# Altium PCB display.PcbDoc
Units mm, origin at the board's own origin, x right, y up, seen from the top; angles counter-clockwise.
Board outline 100 x 100 mm, 2 copper layers (Top Layer, Bottom Layer); 29 components, 52 nets, 138 pads, 0 vias.
Unrouted connection lines stored in the file: 75.
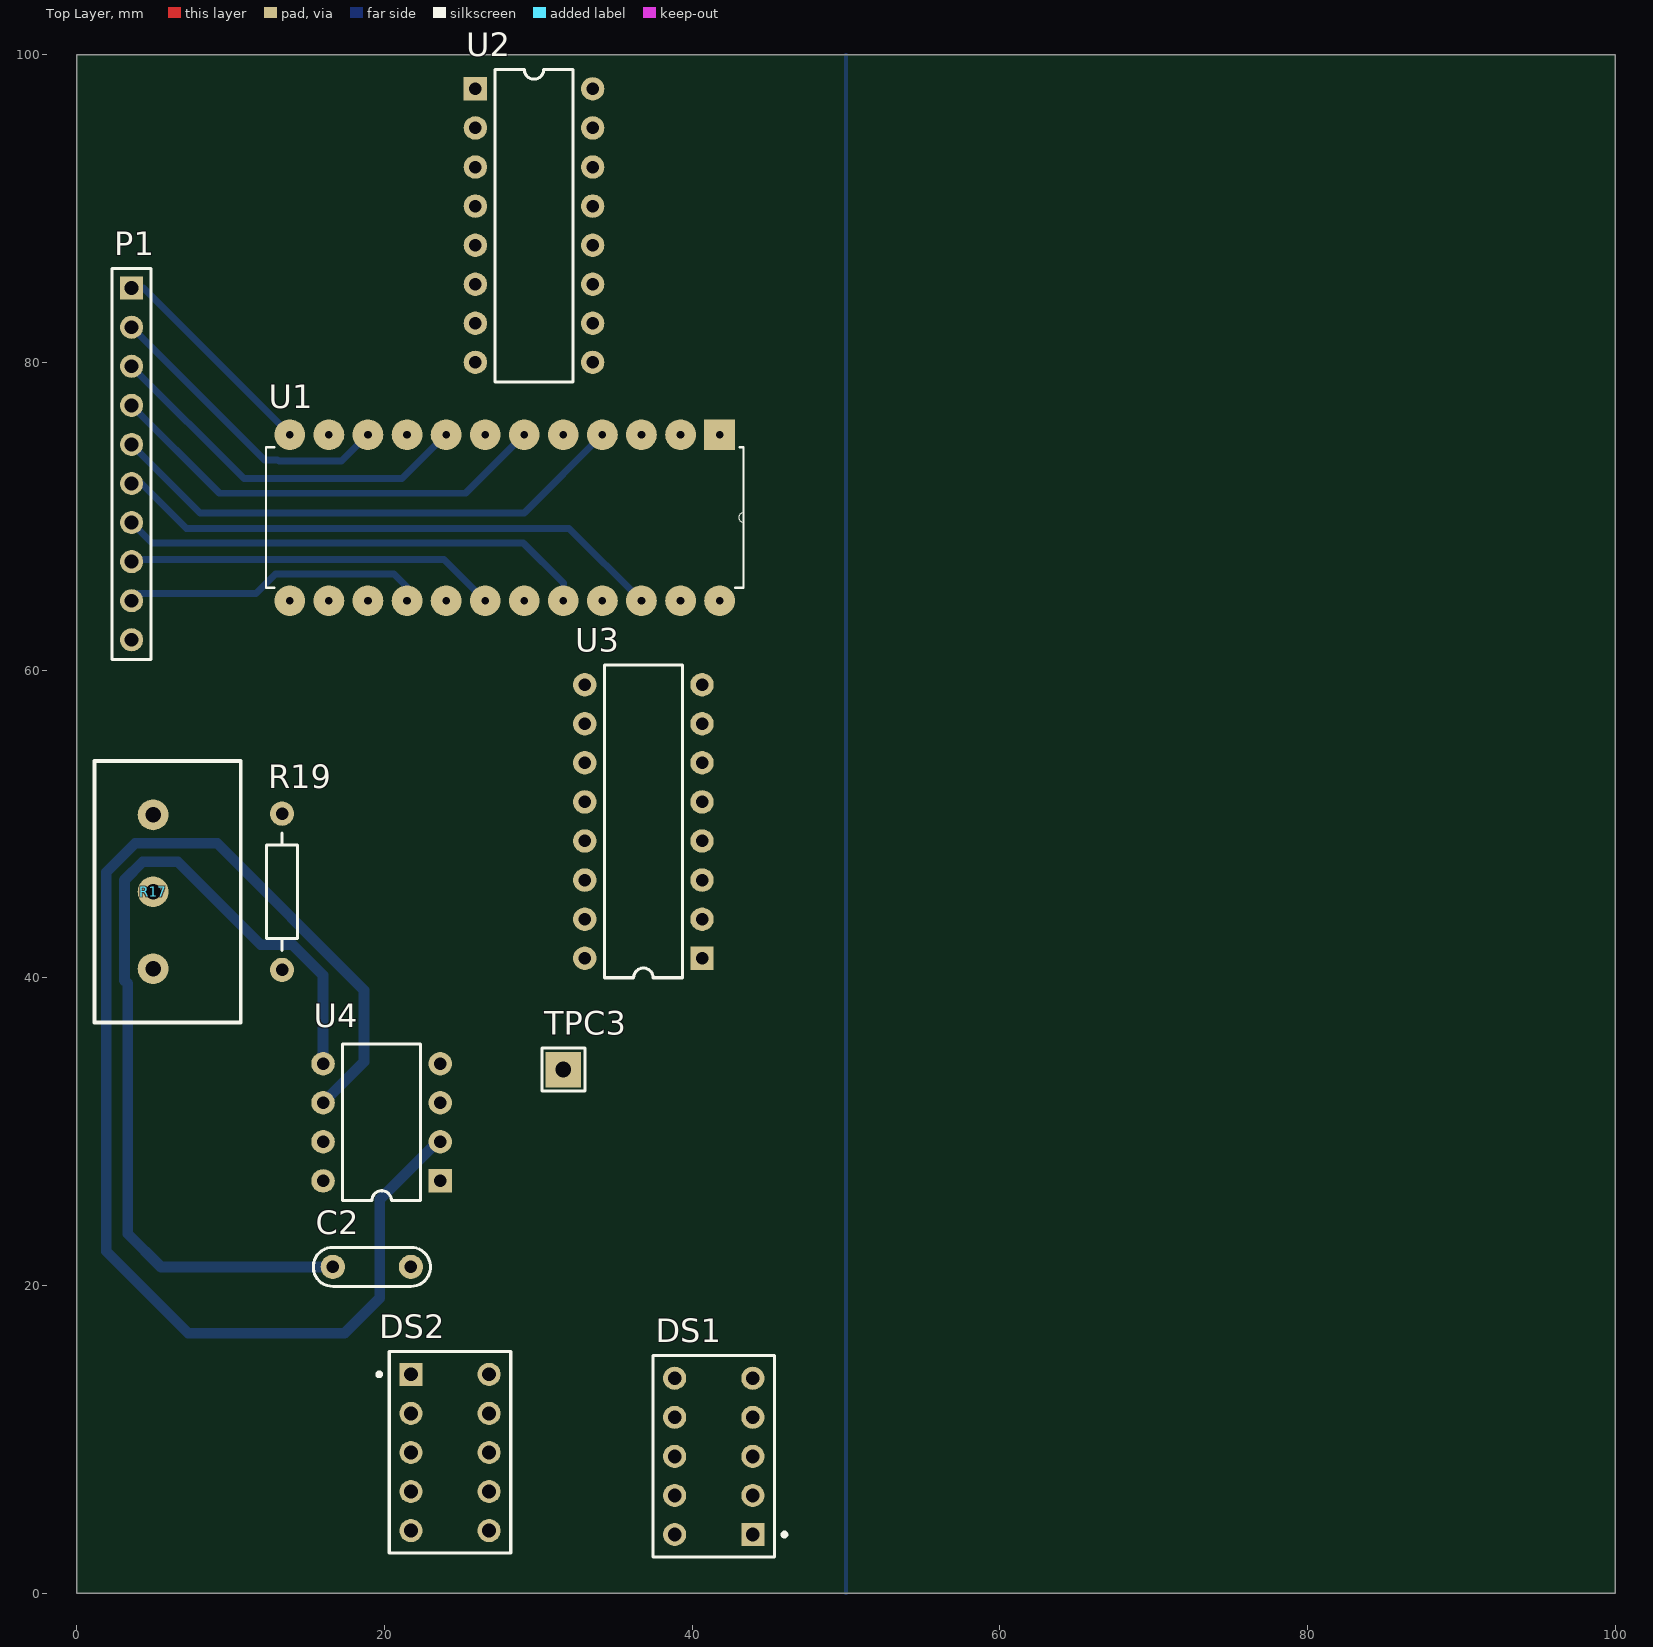
[diagram p0: Top Layer view]
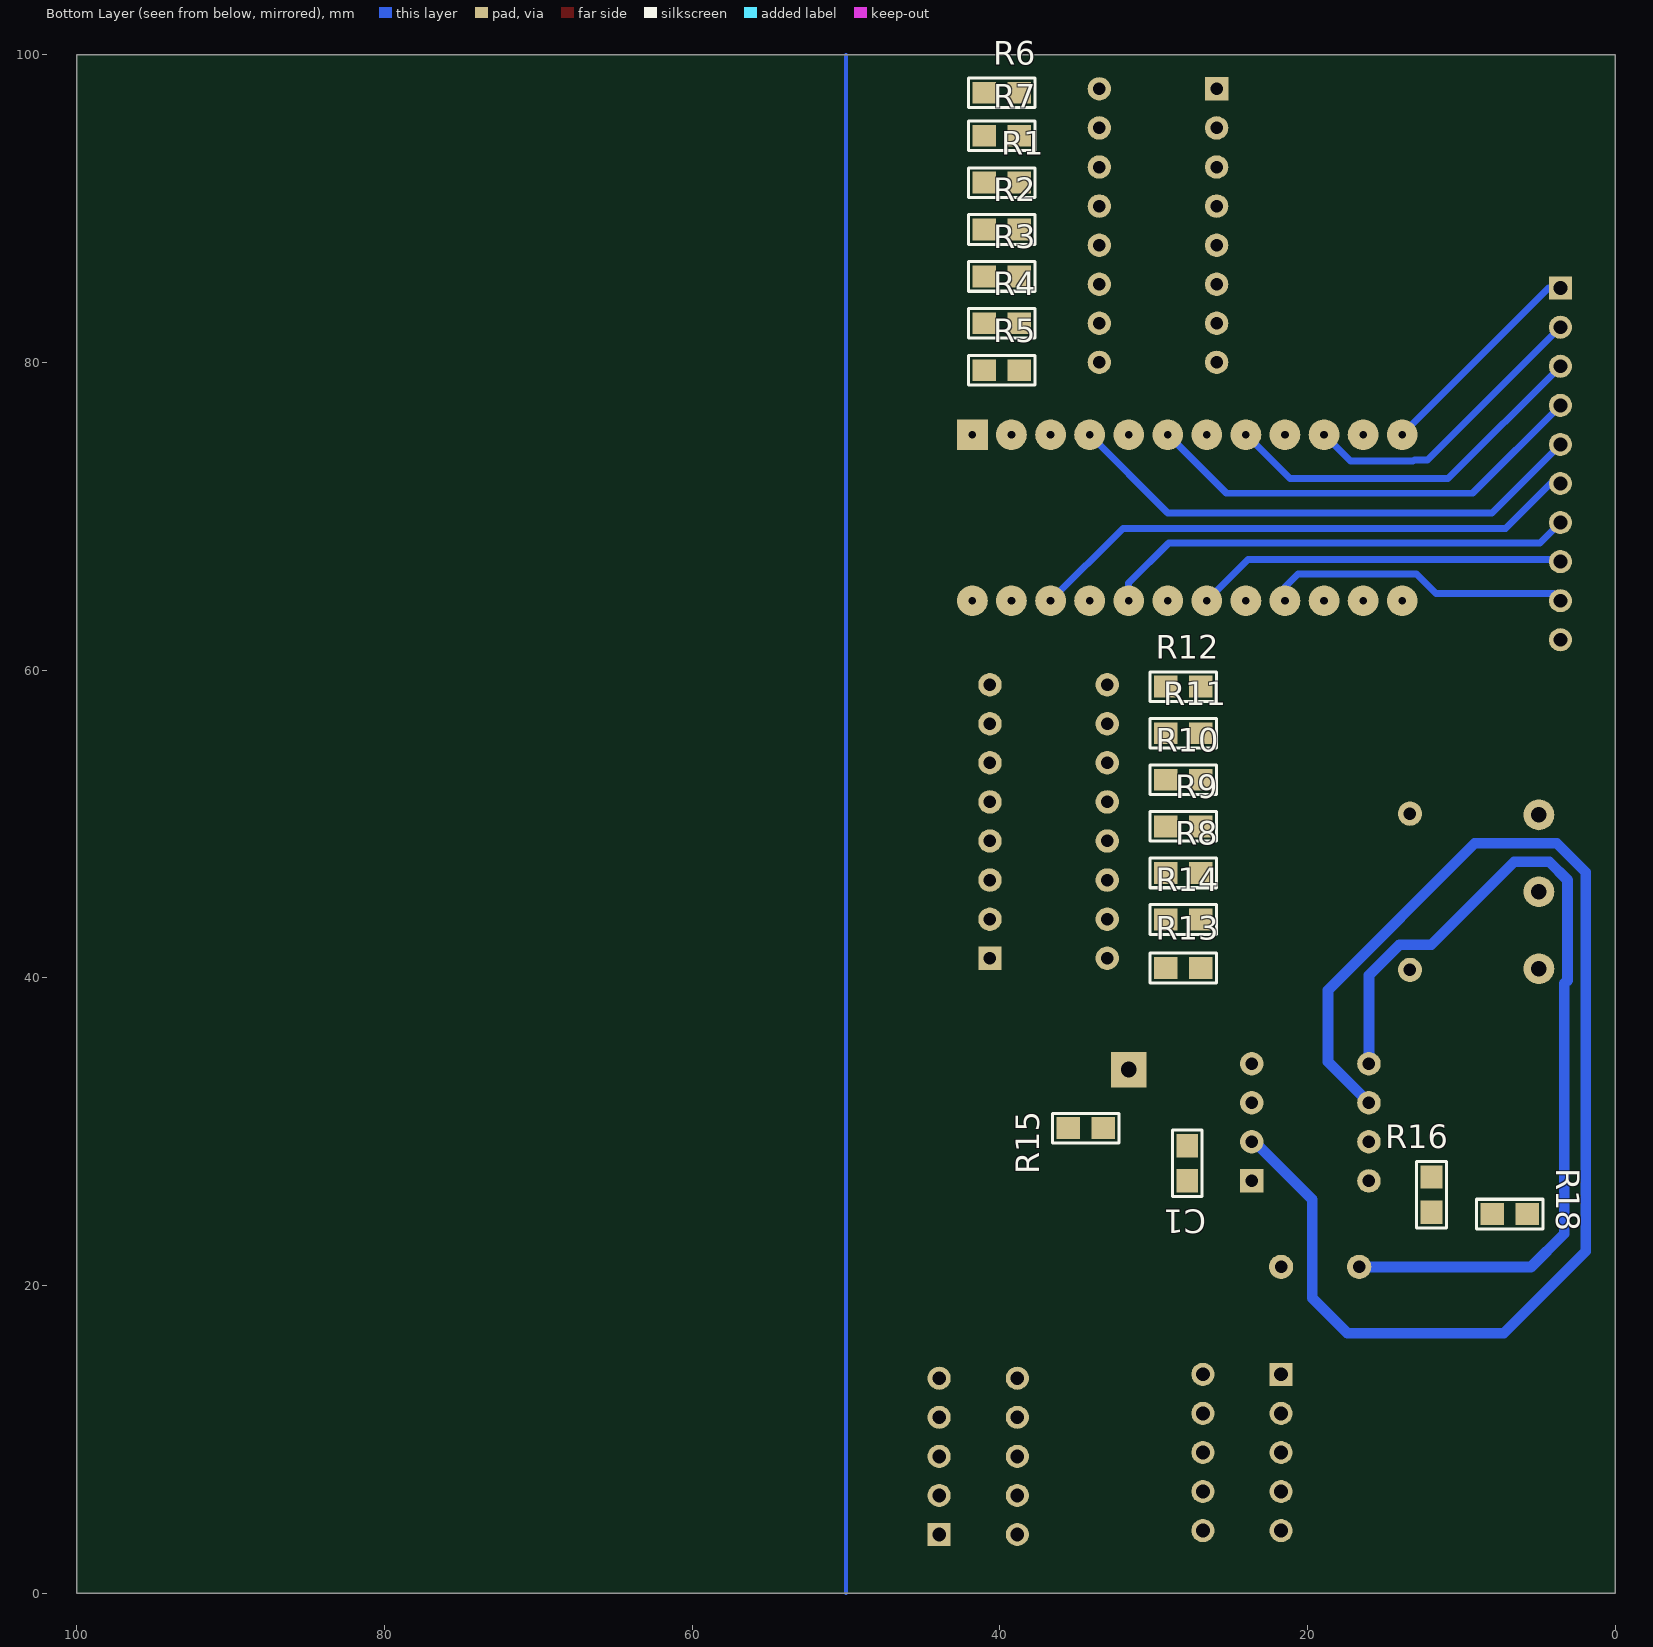
[diagram p1: Bottom Layer view, seen from below]

## Layer stack, top to bottom
Top Solder: solder mask 0.0102, Solder Resist, Dk 3.5
Top Layer: signal copper 0.0356
Dielectric 1: dielectric 0.32, FR-4, Dk 4.8
Bottom Layer: signal copper 0.0356
Bottom Solder: solder mask 0.0102, Solder Resist, Dk 3.5

## Board outline
0,0 100,0 100,100 0,100

## Design rules (kind name [scope] priority, off if disabled: settings)
Clearance [All] p1: gap=0.5 ignorepadtopadclearanceinfootprint=FALSE
PolygonConnect [All] p1: connectstyle=Relief reliefconductorwidth=0.254 reliefentries=4 polygonreliefangle="90 Angle" airgapwidth=0.254
RoutingVias [All] p1: holewidth=0.5 width=2 viastyle="Through Hole" minholewidth=0.5 minwidth=1.5 maxholewidth=0.5 maxwidth=2
SolderMaskExpansion [All] p1: expansion=0.102
Width [All] p1: maxlimit=0.8 minlimit=0.45 preferedwidth=0.7
30 further rules are at their usual default settings.

## Components (designator, comment, footprint, x,y, rotation, side; value= is the part's Value field where it differs from the comment)
C1 "4.7u" 0805 27.813,27.94 r270 bottom
C2 "10n" CAP200 19.177,21.209 r180 top
DS1 "Dpy Red-CC" A 41.402,8.89 r180 top
DS2 "Dpy Red-CC" A 24.257,9.144 r0 top
P1 "Header 10" HDR1X10 3.556,84.836 r270 top
R1 "RES" 0805 39.878,91.694 r0 bottom
R2 "RES" 0805 39.878,88.646 r0 bottom
R3 "RES" 0805 39.878,85.598 r0 bottom
R4 "RES" 0805 39.878,82.55 r0 bottom
R5 "RES" 0805 39.878,79.502 r0 bottom
R6 "RES" 0805 39.878,97.536 r0 bottom
R7 "RES" 0805 39.878,94.742 r0 bottom
R8 "RES" 0805 28.067,46.821 r180 bottom
R9 "RES" 0805 28.067,49.848 r180 bottom
R10 "RES" 0805 28.067,52.874 r180 bottom
R11 "RES" 0805 28.067,55.901 r180 bottom
R12 "RES" 0805 28.067,58.928 r180 bottom
R13 "RES" 0805 28.067,40.64 r180 bottom
R14 "RES" 0805 28.067,43.794 r180 bottom
R15 "RES" 0805 34.417,30.226 r0 bottom
R16 "180" 0805 11.938,25.908 r90 bottom
R17 "500k" POTENCIOMETRO 4.953,45.593 r270 top
R18 "15k" 0805 6.858,24.638 r0 bottom
R19 "680k" RES400 13.335,50.673 r270 top
TPC3 "TP" TPTH 31.623,34.036 r0 top
U1 "CD4508BE" *DIP254P1080X508-24 13.843,64.516 r270 top
U2 "CD4511" DIP16 25.908,97.79 r0 top
U3 "CD4511" DIP16 40.64,41.275 r180 top
U4 "LM555" DIP8 23.622,26.797 r180 top

## Footprints (in the part's own frame and the unit in brackets; to place one, negate y for a bottom-side part, rotate by r counter-clockwise, add the part's x,y. Pads: shape width x height; smd on the part's side, far side on the other; paste and mask are expansions set on the pad)
0805 [mil] "Pasivo 0805"
  rect 60x56 smd: 1(-45,0) 2(45,0)
  silkscreen extent -85,-38 85,38, body extent -39,-25 39,25, height 15
*DIP254P1080X508-24 [mm]
  rect 2x2 hole 0.5: 1(-10.795,27.94)
  round 2 hole 0.5: 2(-10.795,25.4) 3(-10.795,22.86) 4(-10.795,20.32) 5(-10.795,17.78) 6(-10.795,15.24) 7(-10.795,12.7) 8(-10.795,10.16) 9(-10.795,7.62) 10(-10.795,5.08) 11(-10.795,2.54) 12(-10.795,0) 13(0,0) 14(0,2.54) 15(0,5.08) 16(0,7.62) 17(0,10.16) 18(0,12.7) 19(0,15.24) 20(0,17.78) 21(0,20.32) 22(0,22.86) 23(0,25.4) 24(0,27.94)
  silkscreen extent -9.98,-1.55 -0.84,29.49
A [mm] "LED, 7-Segment Display, 7.62 mm, RHD; 10 Leads; Row Space 5.08 mm; Pitch 2.54 mm"
  rect 1.5x1.5 hole 0.9: 1(-2.54,5.08)
  round 1.5 hole 0.9: 2(-2.54,2.54) 3(-2.54,0) 4(-2.54,-2.54) 5(-2.54,-5.08) 6(2.54,-5.08) 7(2.54,-2.54) 8(2.54,0) 9(2.54,2.54) 10(2.54,5.08)
  silkscreen extent -4.73,-6.55 3.95,6.55, body extent -3.95,-6.55 3.95,6.55, height 6.34
CAP200 [mil]
  round 62 hole 32: 1(-100,0) 2(100,0)
  silkscreen extent -150,-50 150,50, body extent -110,-46 110,44, height 246
DIP8 [mil]
  rect 60x60 hole 32: 1(0,0)
  round 60 hole 32: 2(0,-100) 3(0,-200) 4(0,-300) 5(300,-300) 6(300,-200) 7(300,-100) 8(300,0)
  silkscreen extent 50,-350 250,50, body extent -3,-363 303,63, height 177
DIP16 [mil]
  rect 60x60 hole 32: 1(0,0)
  round 60 hole 32: 2(0,-100) 3(0,-200) 4(0,-300) 5(0,-400) 6(0,-500) 7(0,-600) 8(0,-700) 9(300,-700) 10(300,-600) 11(300,-500) 12(300,-400) 13(300,-300) 14(300,-200) 15(300,-100) 16(300,0)
  silkscreen extent 50,-750 250,50, body extent -3,-744 307,44, height 78
HDR1X10 [mm] "Connector; Header; 10 Position"
  rect 1.5x1.5 hole 0.9: 1(0,0)
  round 1.5 hole 0.9: 2(2.54,0) 3(5.08,0) 4(7.62,0) 5(10.16,0) 6(12.7,0) 7(15.24,0) 8(17.78,0) 9(20.32,0) 10(22.86,0)
  silkscreen extent -1.27,-1.27 24.13,1.27
POTENCIOMETRO [mm]
  round 2 hole 1: 1(-5,0) 2(0,0) 3(5,0)
  silkscreen extent -8.5,-3.8 8.5,5.7, body extent -7.87,-20.53 7.87,5.03, height 20.12
RES400 [mil]
  round 62 hole 32: 1(0,0) 2(400,0)
  silkscreen extent 50,-40 350,40, body extent -12,-45 412,46, height 96
TPTH [mm]
  rect 2.3x2.3 hole 1.016: 1(0,0)
  silkscreen extent -1.4,-1.4 1.4,1.4, body extent -1.27,-1.27 1.27,1.27, height 6.04

## Part data
C1 C2: library part CAP
DS1 DS2: "7.62 mm Black Surface HER 7-Segment Display: CC, RH DP", Colour="High Efficiency Red (HER)", ComponentLink1Description="Manufacturer Link", ComponentLink1URL=http://www.agilent.com/, DatasheetVersion=19-Feb-2002, LatestRevisionDate=17-Dec-2003, LatestRevisionNote="Schematic revised, PCB Footprint replaced.", MinimumIntensity="360 ucd", Note="IF = 5 mA", PackageDescription="LED, 7-Segment Display, 7.62 mm, RHD; 10 Leads; Row Space 5.08 mm; Pitch 2.54 mm", PackageReference=A, PackageVersion=11-Feb-2002, Published=8-Jun-2000, Publisher="Altium Limited"
P1: "Header, 10-Pin", LatestRevisionDate=17-Jul-2002, LatestRevisionNote="Re-released for DXP Platform.", Publisher="Altium Limited"
R16 R18 R19: library part RES
R17: library part POTENCIOMETRO
U1: "Latch Transparent 3-ST 8-CH D-Type 24-Pin PDIP", Package="DIP-24 Texas Instruments", Availability=Unavailable, MF="Texas Instruments", MP=CD4508BE, Price=None, SnapEDA_Link=https://www.snapeda.com/parts/CD4508BE/Texas%20Instruments/view-part/?ref=snap
U2 U3: "BCD to 7 SEGMENTOS"
U4: "Timer"

## Nets (pads, with @x,y where several pads share a name; then routed paths per layer and width w, separated by ;. In a path a pad name is that pad's centre, name@x,y a point inside that pad or via, vN(x,y) a via of type N, cw(c..) or ccw(c..) an arc to the next point about the centre after c; other vN are vias at no path point)
bit0: P1.5 U1.4 | length 34.6
  Bottom Layer w0.45: P1.5 8.001,70.231 29.083,70.231 U1.4
bit1: P1.4 U1.6 | length 29.5
  Bottom Layer w0.45: P1.4 9.271,71.501 25.273,71.501 U1.6
bit2: P1.3 U1.8 | length 24.7
  Bottom Layer w0.45: P1.3 10.861,72.451 21.143,72.451 U1.8
bit3: P1.2 U1.10 | length 19.7
  Bottom Layer w0.45: P1.2 12.192,73.66 13.054,73.66 13.128,73.586 17.198,73.586 U1.10
bit4: P1.9 U1.16 | length 19.9
  Bottom Layer w0.45: P1.9 4.012,64.972 11.632,64.972 12.901,66.241 20.627,66.241 21.463,65.405 U1.16
bit5: P1.8 U1.18 | length 24.2
  Bottom Layer w0.45: P1.8 3.691,67.191 23.868,67.191 U1.18
bit6: P1.7 U1.20 | length 30.8
  Bottom Layer w0.45: P1.7 4.887,68.265 29.017,68.265 31.623,65.659 U1.20
bit7: P1.6 U1.22 | length 36.3
  Bottom Layer w0.45: P1.6 4.191,72.136 7.112,69.215 32.004,69.215 U1.22
clock3: R15.1 TPC3.1 U1.2 U1.14 U2.5 U3.5 U4.3
GND: C1.2 C2.1 DS1.1 DS1.6 DS1.7 DS2.1 DS2.6 P1.1 U1.1 U1.3 U1.12 U1.13 U1.15 U2.8 U3.8 U4.1 | length 14.2
  Bottom Layer w0.45: P1.1 4.318,84.836 U1.12
NetC1_1: C1.1 R16.2 U4.2 U4.6 | length 87.5
  Bottom Layer w0.7: U4.6@15.917,31.877 U4.6 18.669,34.544 18.669,39.192 9.118,48.743 3.79,48.743 1.903,46.856 1.903,22.227 7.239,16.891 17.399,16.891 19.685,19.177 19.685,25.586 23.436,29.337 U4.2
NetC2_2: C2.2 U4.5 | length 59.5
  Bottom Layer w0.7: U4.5 16.002,40.162 14.013,42.15 11.952,42.15 6.559,47.543 4.287,47.543 3.103,46.359 3.103,39.827 3.302,39.628 3.302,23.368 5.461,21.209 C2.2
NetDS1_2: DS1.2 R6.2
NetDS1_3: DS1.3 R7.2
NetDS1_4: DS1.4 R5.2
NetDS1_5: DS1.5 R4.2
NetDS1_8: DS1.8 R3.2
NetDS1_9: DS1.9 R2.2
NetDS1_10: DS1.10 R1.2
NetDS2_2: DS2.2 R13.2
NetDS2_3: DS2.3 R14.2
NetDS2_4: DS2.4 R12.2
NetDS2_5: DS2.5 R11.2
NetDS2_7: DS2.7 R15.2
NetDS2_8: DS2.8 R10.2
NetDS2_9: DS2.9 R9.2
NetDS2_10: DS2.10 R8.2
NetR1_1: R1.1 U2.13
NetR2_1: R2.1 U2.12
NetR3_1: R3.1 U2.11
NetR4_1: R4.1 U2.10
NetR5_1: R5.1 U2.9
NetR6_1: R6.1 U2.15
NetR7_1: R7.1 U2.14
NetR8_1: R8.1 U3.13
NetR9_1: R9.1 U3.12
NetR10_1: R10.1 U3.11
NetR11_1: R11.1 U3.10
NetR12_1: R12.1 U3.9
NetR13_1: R13.1 U3.15
NetR14_1: R14.1 U3.14
NetR16_1: R16.1 R18.2 U4.7
NetR17_2: R17.2 R17.3 R18.1 R19.2
NetU1_5: U1.5 U2.7
NetU1_7: U1.7 U2.1
NetU1_9: U1.9 U2.2
NetU1_11: U1.11 U2.6
NetU1_17: U1.17 U3.7
NetU1_19: U1.19 U3.1
NetU1_21: U1.21 U3.2
NetU1_23: U1.23 U3.6
Vcc: P1.10 R17.1 R19.1 U1.24 U2.3 U2.4 U2.16 U3.3 U3.4 U3.16 U4.4 U4.8
copper on no net: | length 100
  Bottom Layer w0.254: 50,0 50,100